# Altium PCB PCB1.PcbDoc
Units mm, origin at the board's own origin, x right, y up, seen from the top; angles counter-clockwise.
Board outline 40.48 x 62.7 mm, 2 copper layers (Top Layer, Bottom Layer); 14 components, 6 nets, 32 pads, 0 vias.
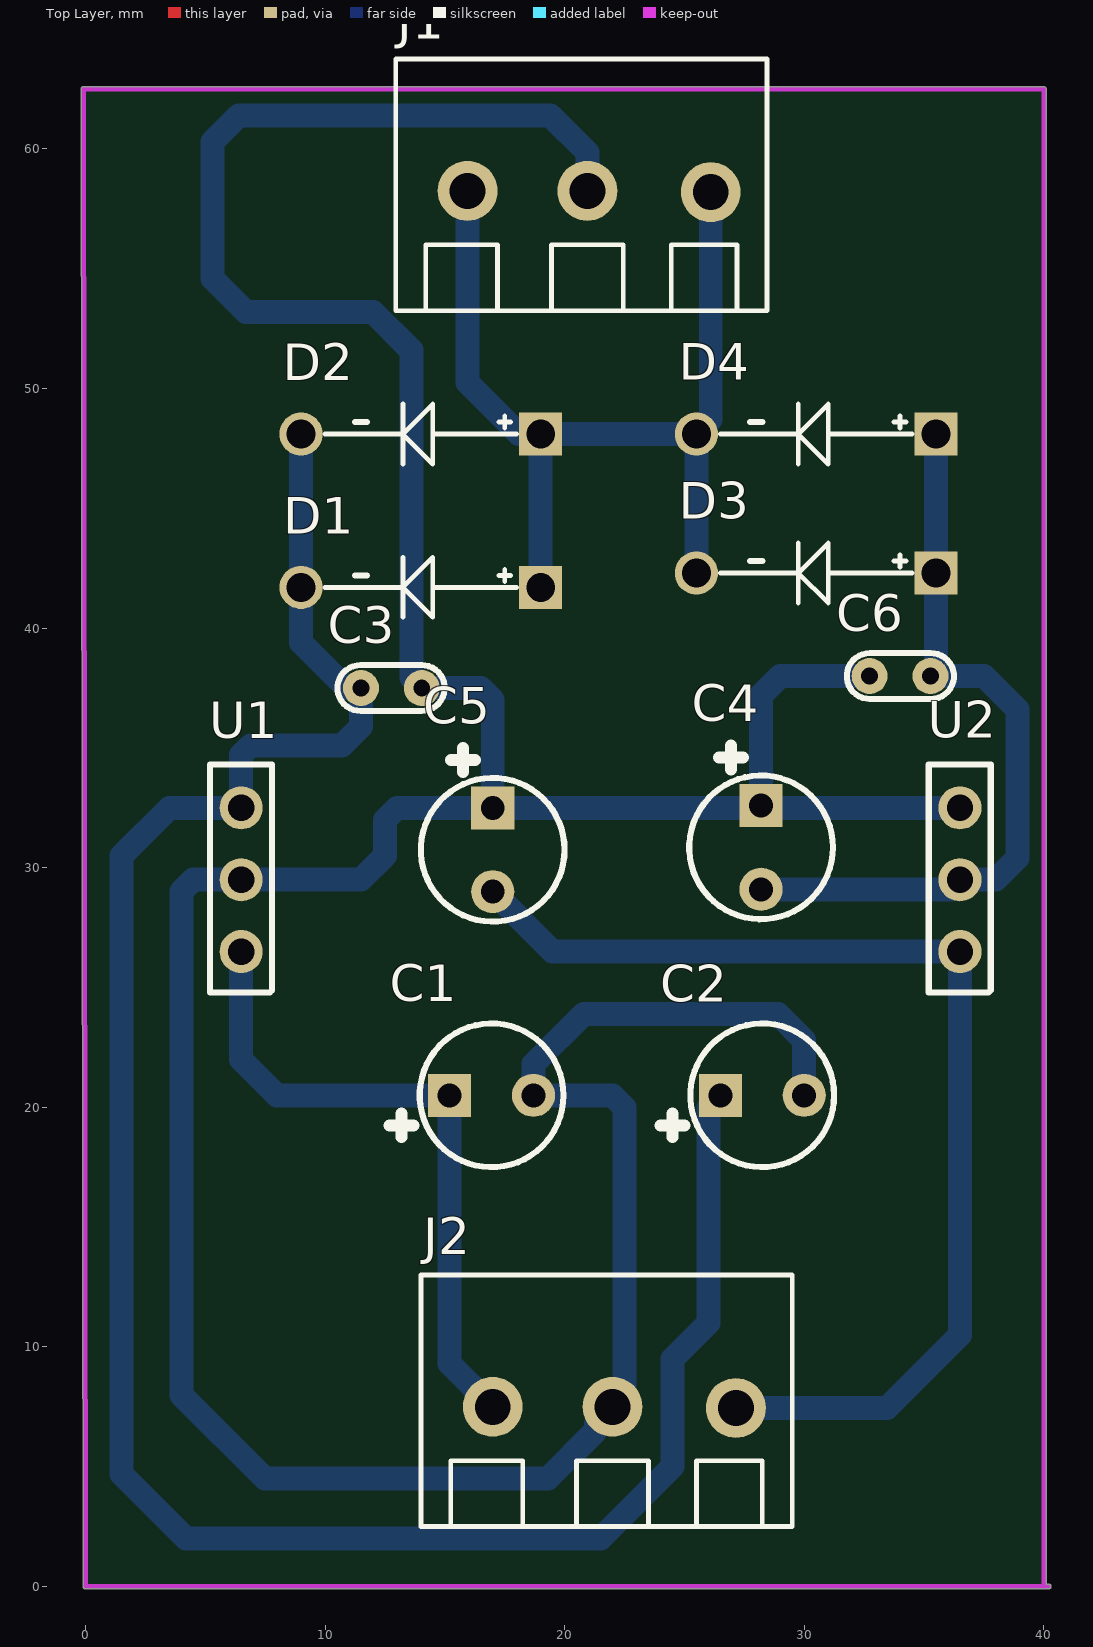
[diagram p0: Top Layer view]
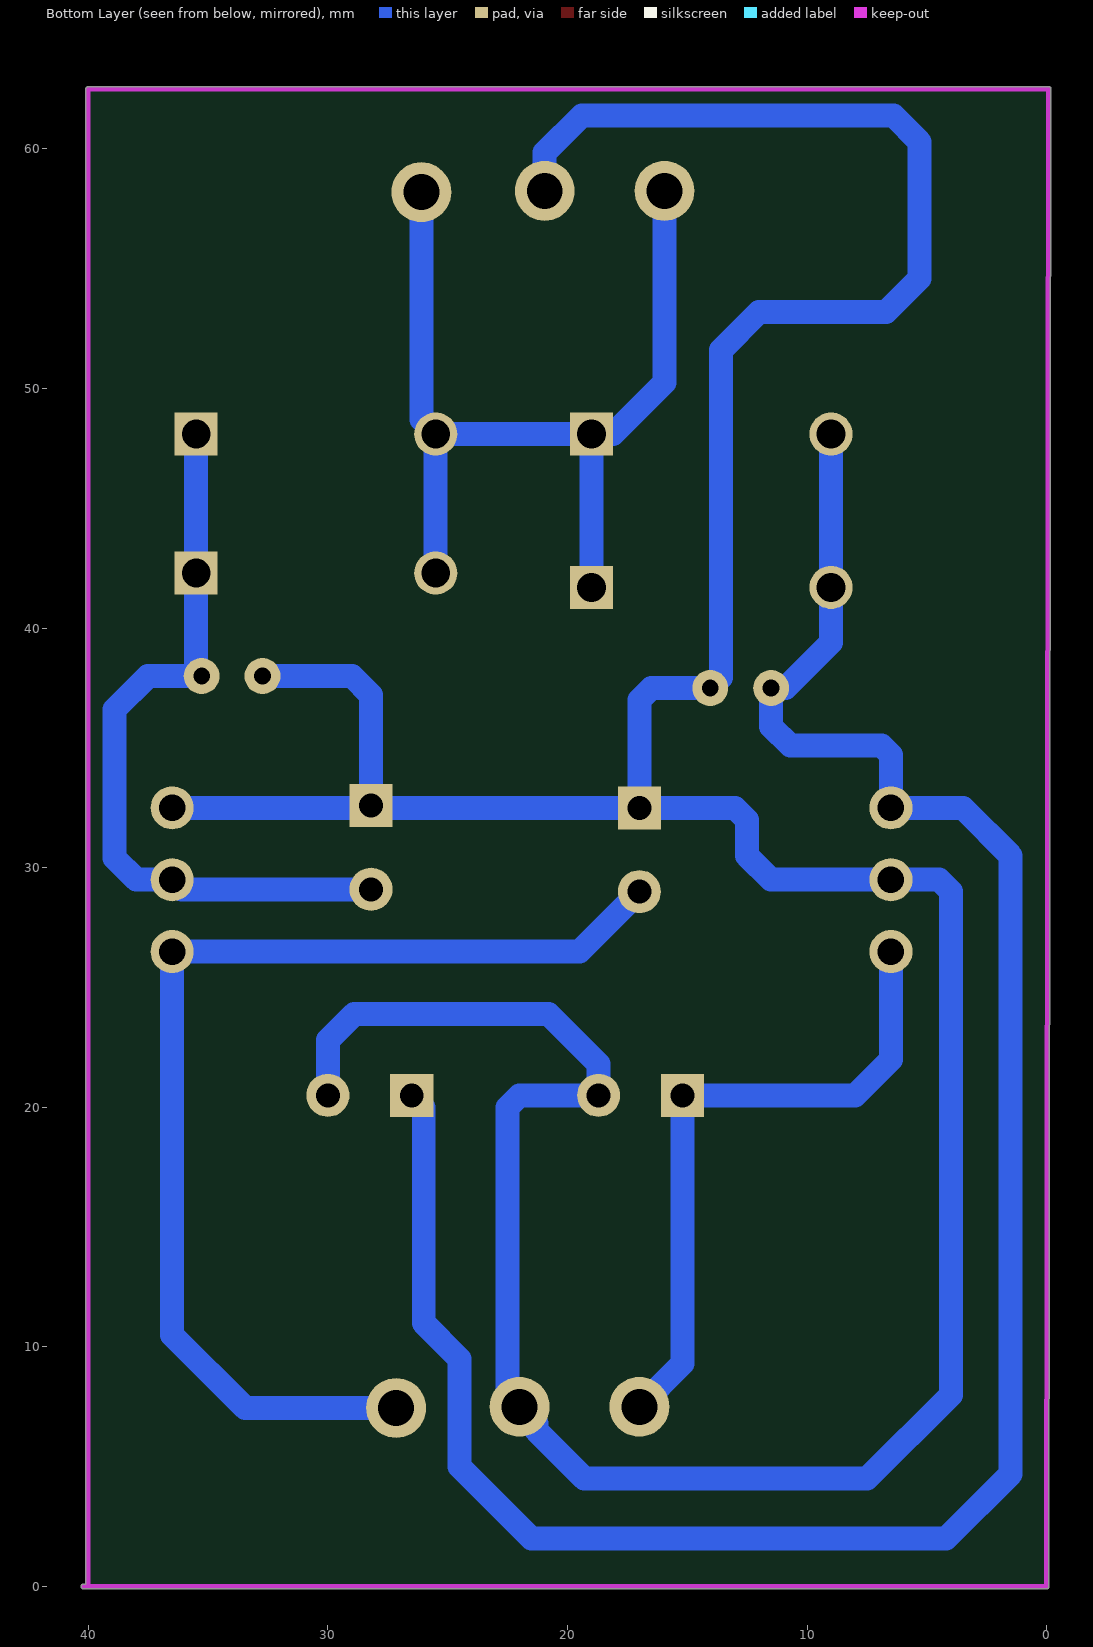
[diagram p1: Bottom Layer view, seen from below]
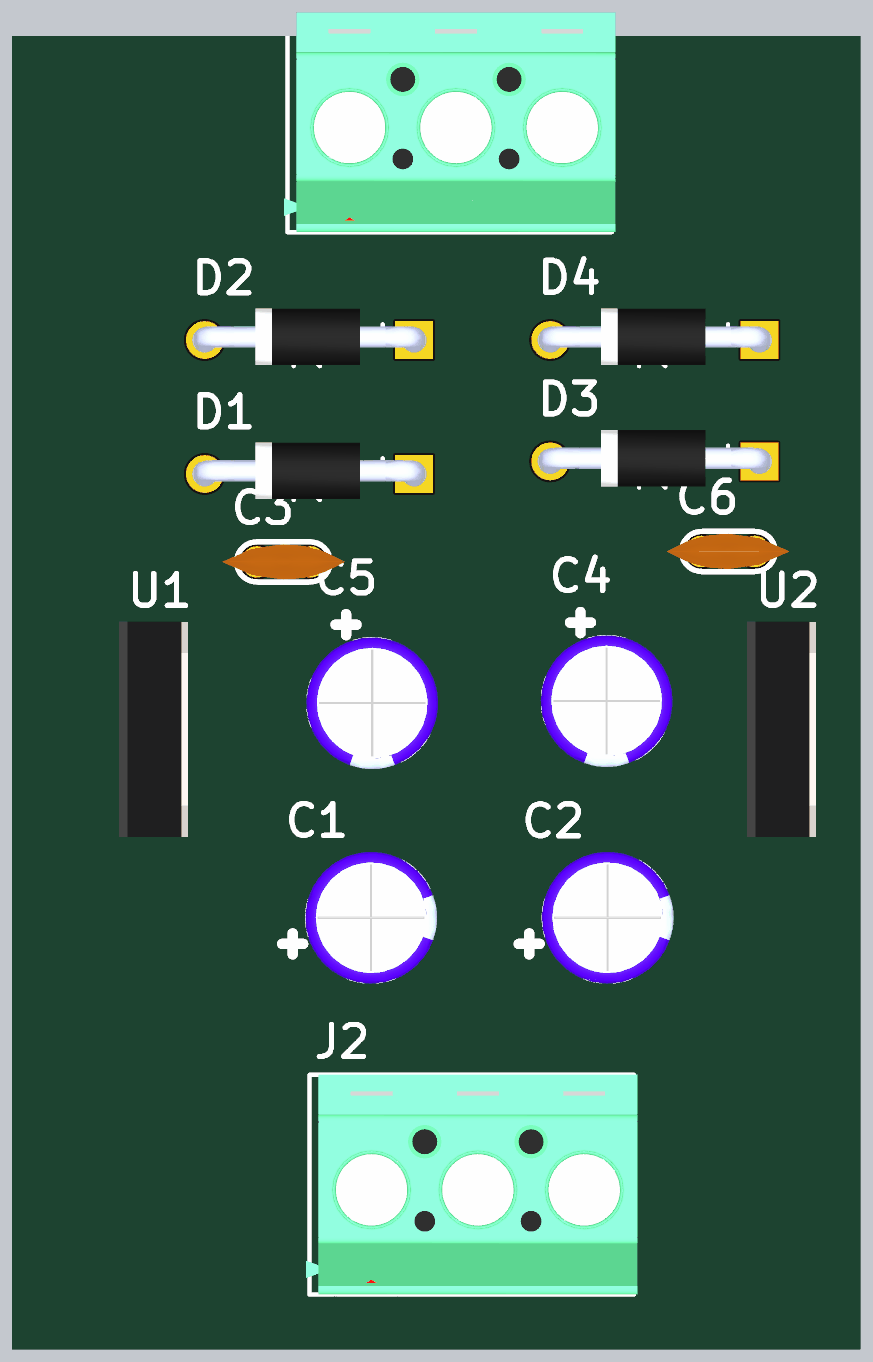
[diagram p2: 3D render of the assembled board from above, using the file's embedded part models]

## Layer stack, top to bottom
Top Solder: solder mask 0.0102, Solder Resist, Dk 3.5
Top Layer: signal copper 0.0356
Dielectric 1: dielectric 0.32, FR-4, Dk 4.8
Bottom Layer: signal copper 0.0356
Bottom Solder: solder mask 0.0102, Solder Resist, Dk 3.5

## Board outline
-0.097,0 ccw(c0.003,0) 0.011,-0.1 40.2,-0.1 ccw(c40.2,0) 40.3,0 ccw(c40.2,0) 40.2,0.1 40.1,0.1 40.1,62.5 ccw(c40,62.5) 40,62.6 -0.08,62.6 ccw(c-0.08,62.5) -0.18,62.5

## Design rules (kind name [scope] priority, off if disabled: settings)
Clearance [All] p1: gap=0.5 ignorepadtopadclearanceinfootprint=FALSE except(0: Arc-Hole Track-Hole SMDPad-Hole THPad-Hole Via-Hole Fill-Hole Poly-Hole Region-Hole Text-Hole)
PolygonConnect [All] p1: connectstyle=Relief reliefconductorwidth=0.254 reliefentries=4 polygonreliefangle="90 Angle" airgapwidth=0.254
RoutingVias [All] p1: holewidth=0.711 width=1.27 viastyle="Through Hole" minholewidth=0.711 minwidth=1.27 maxholewidth=0.711 maxwidth=1.27
SolderMaskExpansion [All] p1: expansion=0.102 istentingtop=FALSE
Width [All] p1: maxlimit=5 minlimit=1 preferedwidth=5
30 further rules are at their usual default settings.

## Components (designator, comment, footprint, x,y, rotation, side; value= is the part's Value field where it differs from the comment)
C1 "capacitor_electric" capacitor_elec_t/h_5mm 18.7,20.5 r180 top
C2 "capacitor_electric" capacitor_elec_t/h_5mm 30,20.5 r180 top
C3 "223" "tu gom" 12.77,37.5 r0 top
C4 "capacitor_electric" capacitor_elec_t/h_5mm 28.2,29.1 r90 top
C5 "capacitor_electric" capacitor_elec_t/h_5mm 17,29 r90 top
C6 "223" "tu gom" 34,38 r180 top
D1 "diod_1N4007" diode_t/h_1N4007 14,41.7 r180 top
D2 "diod_1N4007" diode_t/h_1N4007 14,48.1 r180 top
D3 "diod_1N4007" diode_t/h_1N4007 30.5,42.3 r180 top
D4 "diod_1N4007" diode_t/h_1N4007 30.5,48.1 r180 top
J1 "domino_3pin" domino_3pin_5.08mm 21.1,58.2 r0 top
J2 "domino_3pin" domino_3pin_5.08mm 22.15,7.45 r0 top
U1 "LM7812" LM7812 6.5,29.5 r270 top
U2 "LM7915" LM7915 36.5,29.5 r270 top

## Footprints (in the part's own frame and the unit in brackets; to place one, negate y for a bottom-side part, rotate by r counter-clockwise, add the part's x,y. Pads: shape width x height; smd on the part's side, far side on the other; paste and mask are expansions set on the pad)
capacitor_elec_t/h_5mm [mm]
  rect 1.8x1.8 hole 1: 1(3.5,0)
  round 1.8 hole 1: 2(0,0)
  silkscreen extent -1.25,-3 6,3, body extent -1.4,-3.15 4.91,3.15, height 12
diode_t/h_1N4007 [mm]
  rect 1.8x1.8 hole 1.2: 1(-5,0)
  round 1.8 hole 1.2: 2(5,0)
  silkscreen extent -4,-1.25 4,1.25, body extent -5.51,-1.5 5.51,1.2, height 2.78
domino_3pin_5.08mm [mm]
  round 2.5 hole 1.5: 1(-5.15,0.05) 2(-0.15,0.05) 3(5,0)
  silkscreen extent -8.15,-4.95 7.35,5.55, body extent -8.32,-4.95 7.52,5.55, height 19.5
LM7812 [mm]
  round 1.8 hole 1.1: 1(-3,0) 2(0,0) 3(3,0)
  silkscreen extent -4.8,-1.3 4.7,1.29, body extent -5.15,-1.6 5.15,1.7, height 19.6
LM7915 [mm]
  round 1.8 hole 1.1: 1(-3,0) 2(0,0) 3(3,0)
  silkscreen extent -4.8,-1.3 4.7,1.29, body extent -5.15,-1.6 5.15,1.7, height 19.6
"tu gom" [mm] "Tu gom mini"
  round 1.5 hole 0.7: 1(-1.27,0) 2(1.27,0)
  silkscreen extent -2.25,-0.97 2.22,0.97, body extent -2.92,-0.85 2.92,0.85, height 6.12

## Part data
C3 C6: library part "Tu gom 223 50V", "C?m"

## Nets (pads, with @x,y where several pads share a name; then routed paths per layer and width w, separated by ;. In a path a pad name is that pad's centre, name@x,y a point inside that pad or via, vN(x,y) a via of type N, cw(c..) or ccw(c..) an arc to the next point about the centre after c; other vN are vias at no path point)
15V: D1.1 D2.1 D3.2 D4.2 J1.1 J1.3 | length 41
  Bottom Layer w1: J1.1 15.95,50.25 18.1,48.1 D2.1 ; D1.1 D2.1 ; D3.2 D4.2 ; J1.3 26.1,48.7 D4.2 ; D2.1 D4.2
GND: C1.2 C2.2 C3.2 C4.1 C5.1 C6.2 J1.2 J2.2 U1.2 U2.1 | length 174.7
  Bottom Layer w1: J1.2 20.95,59.85 19.4,61.4 6.4,61.4 5.3,60.3 5.3,54.6 6.7,53.2 12,53.2 13.6,51.6 13.6,37.94 C3.2 16.5,37.5 17,37 C5.1 ; C2.2 30,22.8 28.9,23.9 20.8,23.9 18.7,21.8 C1.2 22,20.5 22.5,20 22.5,8 J2.2 21.3,6.8 21.3,6.5 19.3,4.5 7.5,4.5 4,8 4,29 4.5,29.5 U1.2 11.5,29.5 12.5,30.5 12.5,32 13,32.5 C5.1 ; C6.2 29,38 28.2,37.2 C4.1 ; U2.1 28.3,32.5 C4.1 ; C5.1 28.1,32.5 C4.1
NetC1_1: C1.1 J2.1 U1.3 | length 27.6
  Bottom Layer w1: U1.3 6.5,22 8,20.5 C1.1 15.2,9.3 J2.1
NetC5_2: C5.2 J2.3 U2.3 | length 47.1
  Bottom Layer w1: C5.2 19.5,26.5 U2.3 36.5,10.5 33.45,7.45 J2.3
VIN_U1: C2.1 C3.1 D1.2 D2.2 U1.1 | length 94.6
  Bottom Layer w1: D2.2 D1.2 9,39.4 10.9,37.5 C3.1 11.5,35.9 10.7,35.1 6.9,35.1 6.5,34.7 U1.1 3.5,32.5 1.5,30.5 1.5,4.7 4.2,2 21.5,2 24.5,5 24.5,9.5 26,11 26,20 C2.1
VIN_U2: C4.2 C6.1 D3.1 D4.1 U2.2 | length 31.8
  Bottom Layer w1: C4.2 36.1,29.1 U2.2 38,29.5 38.9,30.4 38.9,36.6 37.5,38 C6.1 35.5,38.23 D3.1 D4.1

## Keep-outs
Keep-Out Layer:
  lines w0.2: 40,0 40,62.5 -0.08,62.5 0.003,0 39.7,0 40.2,0